# Altium PCB Avalon_ctrlunit.PcbDoc (part 6 of 6)
Units mil, origin at the board's own origin, x right, y up, seen from the top; angles counter-clockwise.
Board outline 3947.62 x 3160.22 mil, 4 copper layers (Top Layer, Mid-Layer 1, Mid-Layer 2, Bottom Layer); 194 components, 260 nets, 936 pads, 465 vias.
Unrouted connection lines stored in the file: 1.
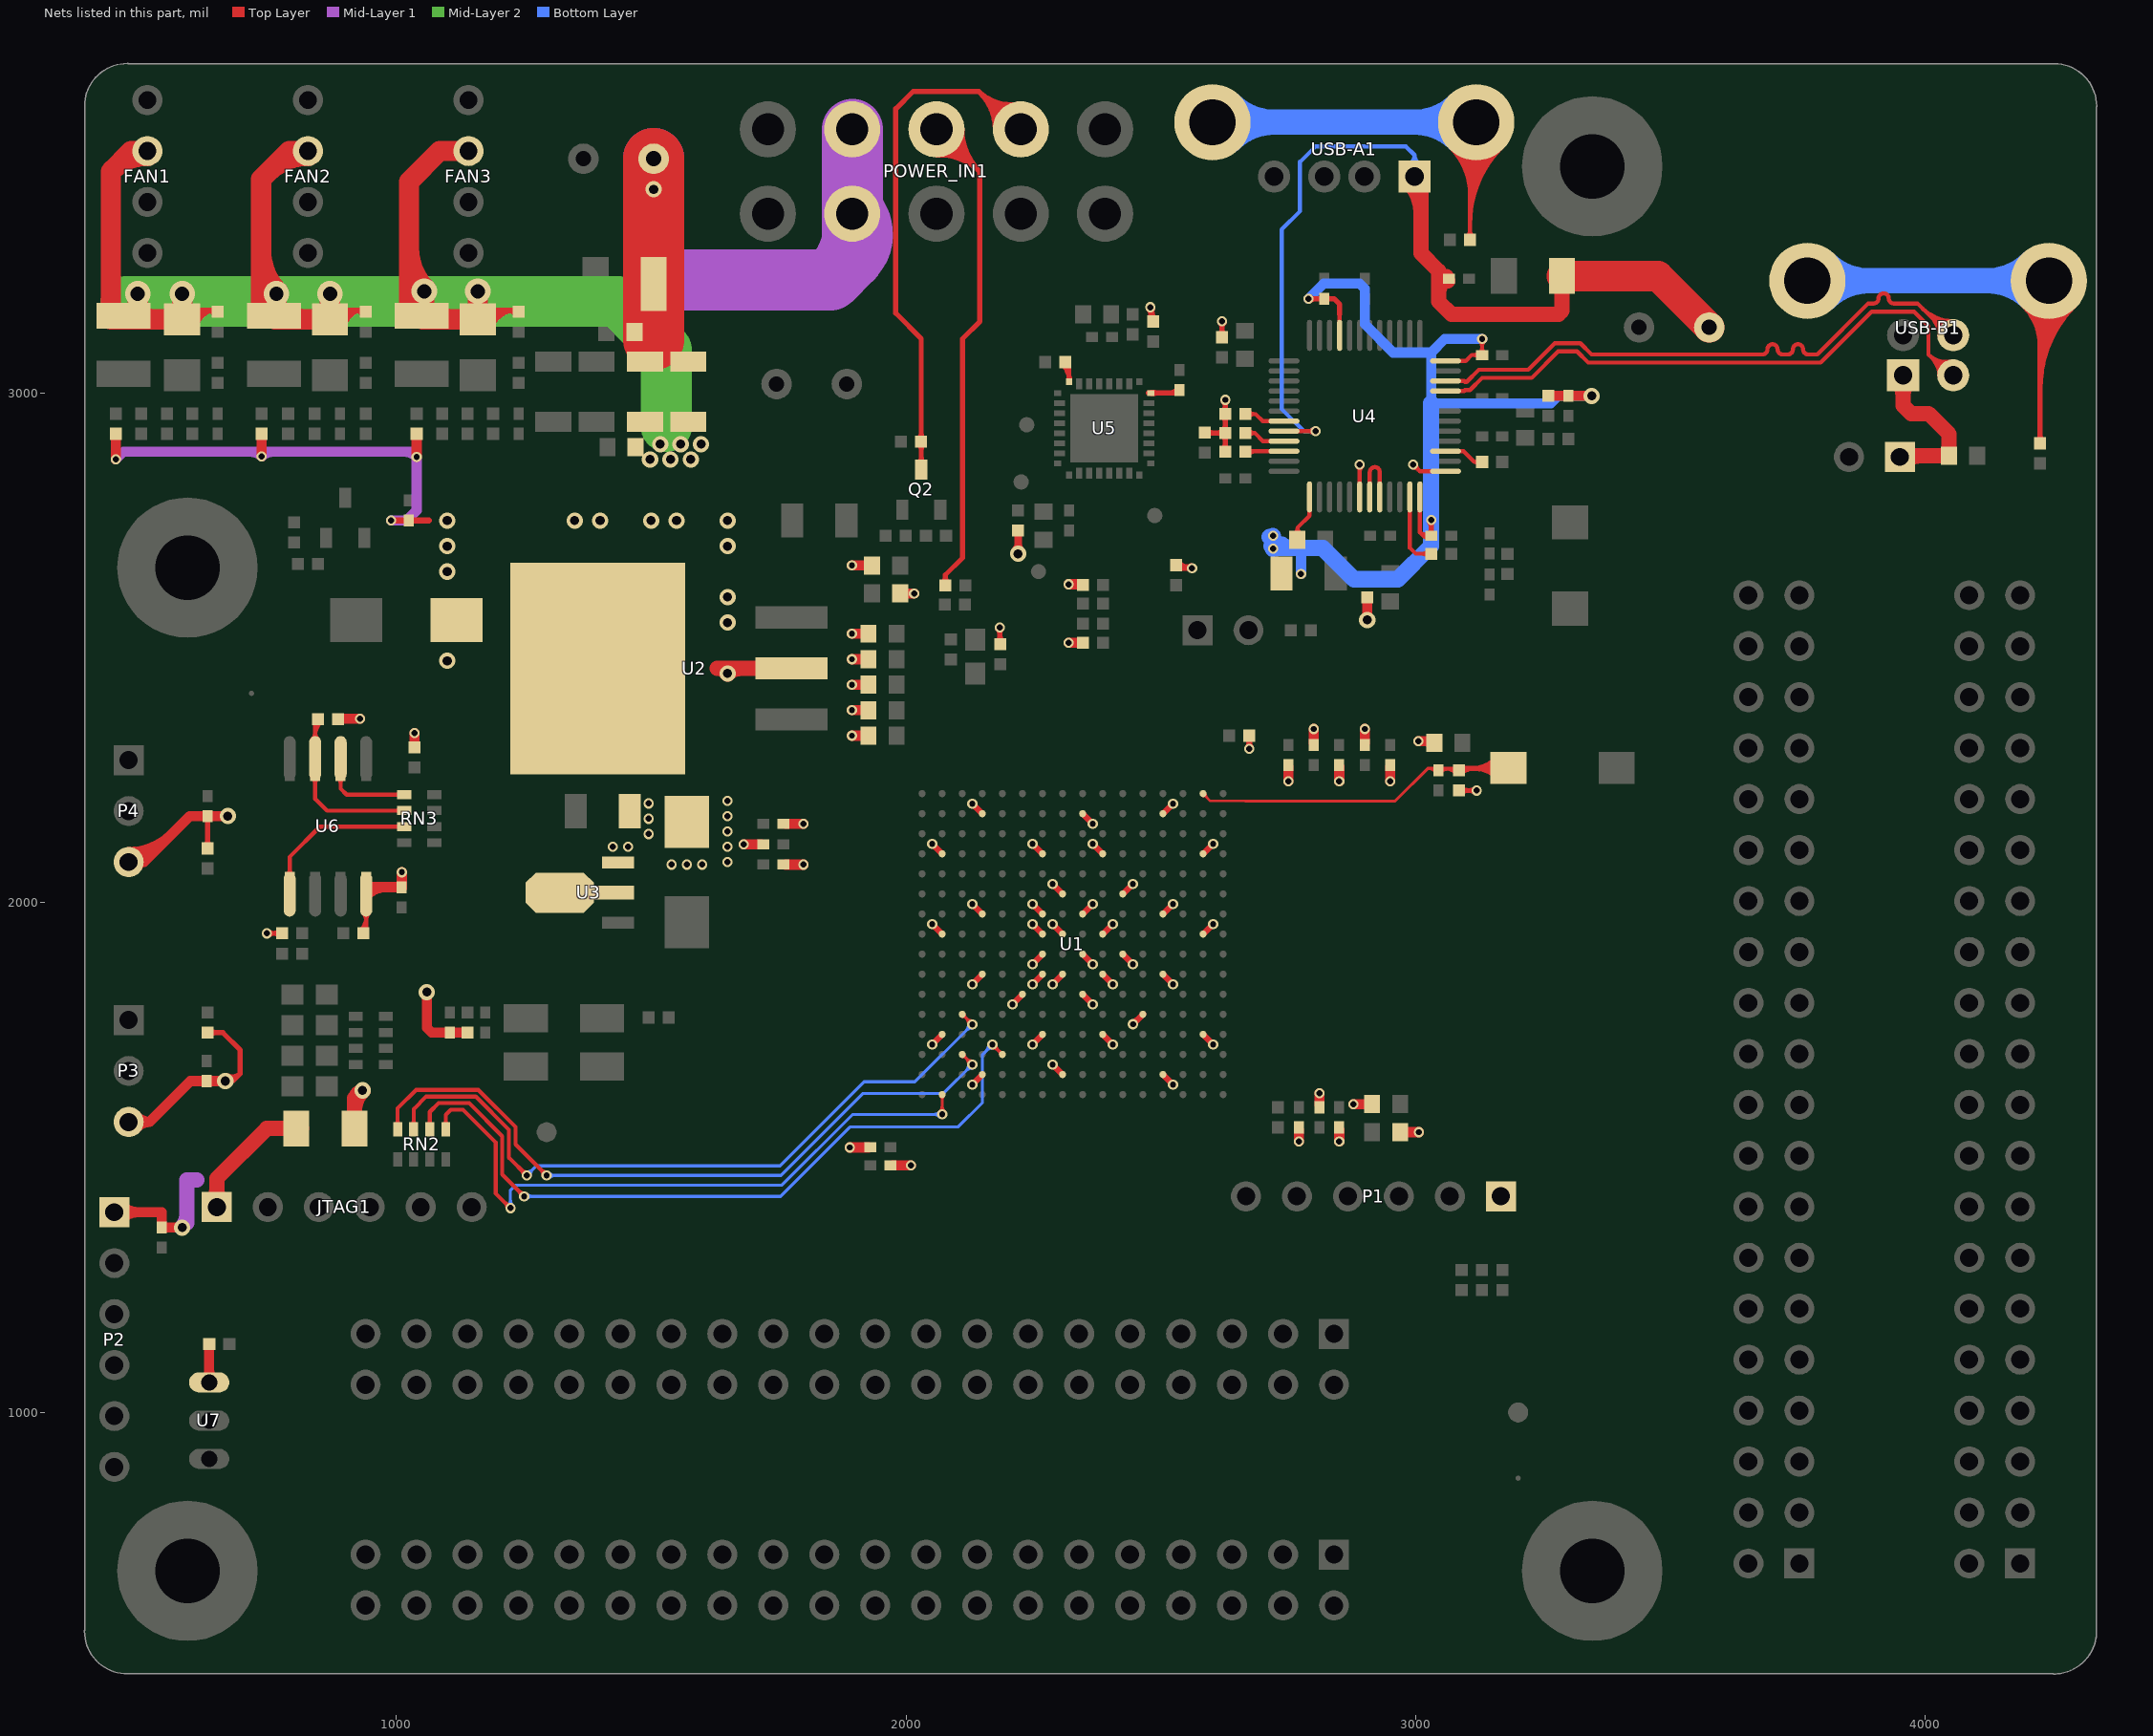
[diagram p8: the nets of this part, all layers, seen from the top]

## Via types
v1: diameter 20, hole 12, Top Layer to Bottom Layer, tented both sides, 334 vias
v2: diameter 32, hole 18, Top Layer to Bottom Layer, tented both sides, 84 vias
v3: diameter 50, hole 28, Top Layer to Bottom Layer, 32 vias
v4: diameter 25.98, hole 12.99, Top Layer to Bottom Layer, tented both sides, 9 vias
v5: diameter 50, hole 28, Top Layer to Bottom Layer, tented both sides, 6 vias

## Nets (pads, with @x,y where several pads share a name; then routed paths per layer and width w, separated by ;. In a path a pad name is that pad's centre, name@x,y a point inside that pad or via, vN(x,y) a via of type N, cw(c..) or ccw(c..) an arc to the next point about the centre after c; other vN are vias at no path point) (continued)
NetR4_1: R4.1 USB-B1.5 USB-B1.6 | length 2168.8
  Top Layer w10: USB-B1.6@4193.03,3171.18 cw(c4115.84,3093.99) 4225,3093.99 ; USB-B1.6@4200.1,3178.25 cw(c4139.98,3118.13) 4225,3118.13 ; USB-B1.6@4207.17,3185.32 cw(c4164.12,3142.27) 4225,3142.27 ; R4.1@4220.18,2906.5 ccw(c4208.56,2918.13) 4225,2918.13 ccw(c4241.44,2918.13) R4.1@4229.82,2906.5 ; R4.1@4225,2901.68 USB-B1.6@4225,3203.15 ; 4225,3010.04 cw(c4452.88,3010.04) USB-B1.6@4291.74,3171.18 ; 4225,3034.18 cw(c4428.74,3034.18) USB-B1.6@4284.67,3178.25 ; 4225,3058.33 cw(c4404.59,3058.33) USB-B1.6@4277.6,3185.32 ; 4225,3082.47 cw(c4380.45,3082.47) USB-B1.6@4270.53,3192.39 ; 4225,3106.61 cw(c4356.31,3106.61) USB-B1.6@4263.46,3199.46 ; 4225,3130.75 cw(c4332.17,3130.75) USB-B1.6@4256.39,3206.53
  Bottom Layer w50: USB-B1.5@3768.37,3220.54 USB-B1.6@4242.39,3220.54 ; USB-B1.5@3803.59,3185.32 cw(c3888.61,3100.3) 3888.61,3220.54 cw(c3888.61,3340.77) USB-B1.5@3803.59,3255.75 ; USB-B1.6@4207.17,3185.32 ccw(c4122.15,3100.3) 4122.15,3220.54 ccw(c4122.15,3340.77) USB-B1.6@4207.17,3255.75
NetR5_1: R5.1 USB-A1.5 USB-A1.6 | length 2307
  Top Layer w8: USB-A1.6@3068.6,3481.67 cw(c2976.64,3389.71) 3106.68,3389.71 ; USB-A1.6@3074.25,3487.32 cw(c2995.95,3409.03) 3106.69,3409.03 ; USB-A1.6@3079.91,3492.98 cw(c3015.27,3428.34) 3106.68,3428.34 ; USB-A1.6@3085.57,3498.64 cw(c3034.58,3447.65) 3106.68,3447.65 ; R5.1@3101.16,3306.52 ccw(c3087.83,3319.86) 3106.68,3319.86 ccw(c3125.54,3319.86) R5.1@3112.21,3306.52 ; R5.1@3106.68,3301 USB-A1.6@3106.68,3519.76 ; 3106.68,3331.88 cw(c3318.51,3331.88) USB-A1.6@3168.73,3481.67 ; 3106.68,3351.2 cw(c3299.2,3351.2) USB-A1.6@3163.07,3487.32 ; 3106.69,3370.51 cw(c3279.88,3370.51) USB-A1.6@3157.41,3492.98 ; 3106.68,3389.83 cw(c3260.57,3389.83) USB-A1.6@3151.76,3498.64 ; 3106.68,3409.14 cw(c3241.25,3409.14) USB-A1.6@3146.1,3504.29 ; 3106.68,3428.45 cw(c3221.94,3428.45) USB-A1.6@3140.44,3509.95 ; 3106.68,3447.77 cw(c3202.63,3447.77) USB-A1.6@3134.79,3515.61
  Bottom Layer w50: USB-A1.5@2601.34,3531.73 USB-A1.6@3118.66,3531.73 ; USB-A1.5@2636.55,3496.52 cw(c2721.57,3411.5) 2721.57,3531.73 cw(c2721.57,3651.97) USB-A1.5@2636.55,3566.95 ; USB-A1.6@3083.45,3496.52 ccw(c2998.43,3411.5) 2998.43,3531.73 ccw(c2998.43,3651.97) USB-A1.6@3083.45,3566.95
NetR7_1: R7.1 U4.11 | length 176.2
  Top Layer w8: U4.11@2988.58,2796.54 2988.58,2696.42 3000,2685 R7.1@3030.32,2685 ; R7.1@3024.79,2679.48 ccw(c3011.46,2666.14) 3011.46,2685 ccw(c3011.46,2703.86) R7.1@3024.79,2690.52
NetR14_1: R14.1 U4.15 | length 101.5
  Top Layer w8: U4.15@3058.46,2886.1 3093.9,2886.1 3115,2865 ; R14.1@3123.99,2860.41 ccw(c3115,2853.89) 3115,2865 ; R14.1@3123.99,2869.59 cw(c3115,2876.11) 3115,2865 ; R14.1@3130.32,2865 3115,2865
NetR18_1: R18.1 U4.45 | length 110.9
  Top Layer w8: R18.1@2665.68,2922 2684,2922 ; R18.1@2671.32,2916.59 cw(c2684,2904.44) 2684,2922 ; R18.1@2671.32,2927.41 ccw(c2684,2939.56) 2684,2922 ; U4.45@2741.54,2905.79 2700.21,2905.79 2684,2922
NetR19_1: R19.1 U4.46 | length 104.4
  Top Layer w8: R19.1@2666.79,2886.1 U4.46@2741.54,2886.1 ; R19.1@2671.21,2879.48 cw(c2687.2,2863.48) 2687.2,2886.1 ; R19.1@2671.21,2890.52 ccw(c2681.88,2901.2) 2681.88,2886.1
NetR20_1: R20.1 U4.43 | length 111.2
  Top Layer w8: R20.1@2665.68,2959 2686,2959 2699.84,2945.16 U4.43@2741.54,2945.16 ; R20.1@2671.21,2953.48 cw(c2684.54,2940.14) 2684.54,2959 cw(c2684.54,2977.86) R20.1@2671.21,2964.52
NetR35_2: R35.2 U5.24 | length 93.9
  Top Layer w8: R35.2@2307.16,3055.48 cw(c2275.92,3024.24) U5.24@2320.1,3024.24 ; R35.2@2312.82,3061.13 cw(c2295.23,3043.55) 2320.1,3043.55 ; U5.24@2320.1,3023.54 R35.2@2320.1,3055.58
  Top Layer w11.81: U5.24@2320.54,3022.42 2320.54,3030.02
NetU4_7: U4.7 U4.8 | length 128.2
  Top Layer w8: U4.7@2909.84,2796.54 2909.84,2844.84 cw(c2920,2844.84) 2920,2855 cw(c2920,2845.47) 2929.53,2845.47 U4.8@2929.53,2796.54
PG: POWER_IN1.3 R12.2 | length 1425.6
  Top Layer w10: POWER_IN1.3@2059.91,3517.68 2061.91,3517.68 2145,3434.58 ; POWER_IN1.3@2060.88,3487.57 cw(c2063.14,3418) 2112.36,3467.22 ; POWER_IN1.3@2061.21,3477.58 cw(c2064.16,3386.39) 2128.68,3450.9 ; POWER_IN1.3@2061.53,3467.59 cw(c2065.19,3354.78) 2145,3434.59 ; R12.2@2072.5,2627.82 ccw(c2060.87,2639.44) 2077.31,2639.44 ccw(c2093.76,2639.44) R12.2@2082.13,2627.82 ; R12.2@2077.31,2623 2077.31,2643.31 2111,2677 2111,3107 2145,3141 2145,3434.58 ; POWER_IN1.3@2090.02,3517.68 ccw(c2157.91,3517.68) 2109.91,3469.68 ; POWER_IN1.3@2100.02,3517.68 ccw(c2192.05,3517.68) 2126.98,3452.61 ; POWER_IN1.3@2110.02,3517.68 ccw(c2226.19,3517.68) 2144.05,3435.53
PLVCC3V3: C55.2 U5.16 | length 91.2
  Top Layer w10: U5.16@2475.75,3000.35 2531.04,3000.35 C55.2@2537,3006.31 ; 2515.67,3000.35 ccw(c2515.67,3025.67) C55.2@2533.58,3007.77
  Top Layer w11.81: U5.16@2480.67,3000.35 2488.27,3000.35
PROG_B1: C64.1 PROG.2 R59.2 U1.T2 | length 958.6
  Top Layer w5: U1.T2@2582.91,2209.78 cw(c2582.91,2198.91) 2590.59,2206.59 cw(c2598.27,2214.28) U1.T2@2587.41,2214.28 ; U1.T2@2582.91,2214.28 2597.41,2199.78 2665.22,2199.78
  Top Layer w6: 2665.22,2199.78 2959.78,2199.78 3023.62,2263.62 R59.2@3085,2263.62 ; 3023.73,2263.62 cw(c3023.73,2240.38) C64.1@3040.16,2256.82 ; 3033.23,2263.62 ccw(c3033.23,2273.42) C64.1@3040.16,2266.49 ; C64.1@3045.77,2259.35 cw(c3052.57,2256.39) C64.1@3054.49,2263.55 ; C64.1@3049.84,2256.82 cw(c3066.27,2240.38) 3066.27,2263.62 ; C64.1@3049.84,2266.49 ccw(c3056.77,2273.42) 3056.77,2263.62 ; C64.1@3051.27,2256.95 cw(c3059.03,2253.57) 3061.22,2261.75 ; C64.1@3054.22,2263.62 cw(c3054.22,2228.91) R59.2@3078.77,2253.45 ; 3068.71,2263.62 cw(c3068.71,2243.39) R59.2@3083.01,2257.7 ; R59.2@3073.23,2263.62 ccw(c3073.23,2271.45) R59.2@3078.77,2265.92
  Top Layer w10: R59.2@3085,2263.62 PROG.2@3181.7,2263.62 ; R59.2@3089.82,2254.87 cw(c3110.95,2233.74) 3110.95,2263.62 ; 3110.47,2263.62 ccw(c3110.47,2332.29) PROG.2@3159.03,2283.74 ; 3117.12,2263.62 cw(c3117.12,2204.36) PROG.2@3159.03,2246.26 ; 3134.61,2263.62 ccw(c3134.61,2308.15) PROG.2@3166.1,2276.66 ; 3141.27,2263.62 cw(c3141.27,2228.5) PROG.2@3166.1,2253.34
PSON#: POWER_IN1.4 Q2.3 R17.1 | length 1483.2
  Top Layer w10: R17.1@2024.87,2900.18 cw(c2012.48,2887.8) 2030,2887.8 ; R17.1@2024.87,2909.82 ccw(c2012.48,2922.2) 2030,2922.2 ; Q2.3@2025.18,2863.06 ccw(c2013.56,2874.69) 2030,2874.69 ccw(c2046.44,2874.69) Q2.3@2034.82,2863.06 ; Q2.3@2030,2850.37 2030,3107 1980,3157 1980,3558 2014,3592 2143,3592 ; 2030,2889.32 cw(c2045.37,2889.32) R17.1@2034.5,2900.18 ; 2030,2920.68 ccw(c2045.37,2920.68) R17.1@2034.5,2909.82 ; 2145.31,3589.69 cw(c2073.31,3517.68) POWER_IN1.4@2175.14,3517.68 ; 2157.05,3577.95 ccw(c2208.66,3629.56) POWER_IN1.4@2219.37,3557.36 ; 2162.39,3572.61 cw(c2107.45,3517.68) POWER_IN1.4@2185.14,3517.68 ; 2171.1,3563.9 ccw(c2212.29,3605.09) POWER_IN1.4@2220.84,3547.47 ; 2179.46,3555.54 cw(c2141.59,3517.68) POWER_IN1.4@2195.14,3517.68 ; POWER_IN1.4@2217.91,3567.25 cw(c2205.03,3654.03) 2143,3592 ; POWER_IN1.4@2225.26,3517.68 2217.32,3517.68 2143,3592
SDI_A: RN3.3 U6.5 | length 412.8
  Top Layer w8: U6.5@785.48,2053.16 ccw(c772.14,2066.5) 791,2066.5 ccw(c809.86,2066.5) U6.5@796.52,2053.16 ; U6.5@786.87,2031.86 cw(c776.89,2021.89) 791,2021.89 cw(c805.11,2021.89) U6.5@795.13,2031.86 ; U6.5@786.87,2055.44 ccw(c776.89,2065.42) 791,2065.42 ccw(c805.11,2065.42) U6.5@795.13,2055.44 ; U6.5@791,2016.14 U6.5@791,2043.65 791,2090 850.25,2149.25 RN3.3@1013,2149.25 ; 998.47,2149.25 ccw(c998.47,2161.84) RN3.3@1007.37,2152.94 ; 999.68,2149.25 cw(c999.68,2138.38) RN3.3@1007.37,2146.07
SDO_A: RN3.1 U6.2 | length 279.1
  Top Layer w8: U6.2@885.48,2246.84 cw(c872.14,2233.5) 891,2233.5 cw(c909.86,2233.5) U6.2@896.52,2246.84 ; U6.2@886.87,2244.56 cw(c876.89,2234.58) 891,2234.58 cw(c905.11,2234.58) U6.2@895.13,2244.56 ; U6.2@886.87,2268.14 ccw(c876.89,2278.11) 891,2278.11 ccw(c905.11,2278.11) U6.2@895.13,2268.14 ; U6.2@891,2283.86 U6.2@891,2256.35 891,2253.35 891,2224 902.76,2212.24 RN3.1@1013,2212.24 ; 998.47,2212.24 ccw(c998.47,2224.83) RN3.1@1007.37,2215.93 ; 999.68,2212.24 cw(c999.68,2201.38) RN3.1@1007.37,2209.06
TCK: RN2.4 U1.C14 | length 1529.8
  Top Layer w6: U1.C14@2110.46,1698.46 cw(c2110.46,1688.81) 2117.29,1695.64 cw(c2124.12,1702.46) U1.C14@2114.46,1702.46 ; U1.C14@2110.46,1702.46 v1(2130.15,1682.78) v1@2131.98,1680.95 ; v1@2123.15,1682.78 ccw(c2106.25,1682.78) 2118.2,1694.73 ccw(c2130.15,1706.68) v1@2130.15,1689.78
  Top Layer w8: RN2.4@999.32,1563.88 ccw(c991.03,1572.18) 1002.76,1572.18 ccw(c1014.48,1572.18) RN2.4@1006.19,1563.88 ; RN2.4@1002.76,1555.53 1002.76,1596.76 1039,1633 1161.15,1633 1234,1560.15 1234,1526 v1(1295,1465) ; v1@1289,1465 ccw(c1274.51,1465) 1284.76,1475.24 ccw(c1295,1485.49) v1@1295,1471
  Bottom Layer w6: v1(1295,1465) 1755,1465 1916,1626 2073.37,1626 v1(2130.15,1682.78) ; v1@1299.95,1460.05 cw(c1311.9,1448.1) 1311.9,1465 cw(c1311.9,1481.9) v1@1299.95,1469.95 ; v1@2123.15,1682.78 cw(c2106.25,1682.78) 2118.2,1670.83 cw(c2130.15,1658.88) v1@2130.15,1675.78
TDI: RN2.2 U1.C12 | length 1610.2
  Top Layer w6: v1@2167.69,1723.98 v1(2169.52,1722.15) U1.C12@2189.2,1702.46 ; v1@2169.52,1715.15 cw(c2169.52,1698.25) 2181.47,1710.2 cw(c2193.42,1722.15) v1@2176.52,1722.15 ; U1.C12@2185.2,1702.46 ccw(c2175.55,1702.46) 2182.38,1709.29 ccw(c2189.2,1716.12) U1.C12@2189.2,1706.46
  Top Layer w8: RN2.2@1062.31,1563.88 ccw(c1054.02,1572.18) 1065.75,1572.18 ccw(c1077.48,1572.18) RN2.2@1069.18,1563.88 ; RN2.2@1065.75,1555.53 1065.75,1589.75 1083,1607 1143,1607 1208,1542 1208,1467 v1(1251,1424) ; v1@1245,1424 ccw(c1230.51,1424) 1240.76,1434.24 ccw(c1251,1444.49) v1@1251,1430
  Bottom Layer w6: v1(1251,1424) 1754,1424 1890,1560 2102,1560 2150,1608 2150,1702.63 v1(2169.52,1722.15) ; v1@1255.95,1419.05 cw(c1267.9,1407.1) 1267.9,1424 cw(c1267.9,1440.9) v1@1255.95,1428.95 ; v1@2162.52,1722.15 cw(c2145.62,1722.15) 2157.57,1710.2 cw(c2169.52,1698.25) v1@2169.52,1715.15
TDO: RN2.3 U1.E14 | length 1531.4
  Top Layer w6: U1.E14@2110.46,1777.2 cw(c2110.46,1767.55) 2117.29,1774.38 cw(c2124.12,1781.2) U1.E14@2114.46,1781.2 ; U1.E14@2110.46,1781.2 v1(2130.15,1761.52) v1@2131.98,1759.69 ; v1@2123.15,1761.52 ccw(c2106.25,1761.52) 2118.2,1773.47 ccw(c2130.15,1785.42) v1@2130.15,1768.52
  Top Layer w8: RN2.3@1030.82,1563.88 ccw(c1022.52,1572.18) 1034.25,1572.18 ccw(c1045.98,1572.18) RN2.3@1037.69,1563.88 ; RN2.3@1034.25,1555.53 1034.25,1595.25 1059,1620 1155.77,1620 1221,1554.77 1221,1500 v1(1256,1465) ; v1@1250,1465 ccw(c1235.51,1465) 1245.76,1475.24 ccw(c1256,1485.49) v1@1256,1471
  Bottom Layer w6: v1(1256,1465) 1275,1484 1753,1484 1918,1649 2017.63,1649 v1(2130.15,1761.52) ; v1@1256,1472 ccw(c1256,1488.9) 1267.95,1476.95 ccw(c1279.9,1465) v1@1263,1465 ; v1@2123.15,1761.52 cw(c2106.25,1761.52) 2118.2,1749.57 cw(c2130.15,1737.62) v1@2130.15,1754.52
TMS: RN2.1 U1.A15 | length 1416.6
  Top Layer w6: v1@2066.14,1589.85 ccw(c2054.2,1601.8) 2071.09,1601.8 ccw(c2087.99,1601.8) v1@2076.04,1589.85 ; U1.A15@2068.27,1620.9 cw(c2061.44,1614.07) 2071.09,1614.07 cw(c2080.75,1614.07) U1.A15@2073.92,1620.9 ; v1(2071.09,1584.9) U1.A15@2071.09,1623.72
  Top Layer w8: RN2.1@1093.81,1563.88 ccw(c1085.52,1572.18) 1097.24,1572.18 ccw(c1108.97,1572.18) RN2.1@1100.68,1563.88 ; RN2.1@1097.24,1555.53 1097.24,1584.24 1107,1594 1131,1594 1195,1530 1195,1430 v1(1224,1401) ; v1@1218,1401 ccw(c1203.51,1401) 1213.76,1411.24 ccw(c1224,1421.49) v1@1224,1407
  Bottom Layer w6: v1@1219.05,1405.95 ccw(c1207.1,1417.9) 1224,1417.9 ccw(c1240.9,1417.9) v1@1228.95,1405.95 ; v1(1224,1401) 1224,1436 1234,1446 1757,1446 1895.9,1584.9 v1(2071.09,1584.9) ; v1@2066.14,1579.95 ccw(c2054.2,1568) 2054.2,1584.9 ccw(c2054.2,1601.8) v1@2066.14,1589.85
USB_N: U4.21 USB-B1.2 | length 1331.9
  Top Layer w8: U4.21@3058.46,3004.21 3095,3004.21 3096.84,3006.06 3106.63,3006.06 3130.57,3030 3227.63,3030 3279.63,3082 3316.37,3082 3338.37,3060 3794.63,3060 3894.63,3160 3977.81,3160 4006,3131.81 4006,3075.69 ; 4013.31,3068.38 cw(c3980.03,3035.1) USB-B1.2@4027.09,3035.1 ; 4016.76,3064.93 ccw(c4044.04,3092.21) USB-B1.2@4051.05,3054.27 ; 4026.97,3054.73 cw(c4007.34,3035.1) USB-B1.2@4035.09,3035.1 ; 4027.52,3054.17 ccw(c4047.4,3074.05) USB-B1.2@4052.5,3046.41 ; USB-B1.2@4049.6,3062.14 cw(c4040.68,3110.37) 4006,3075.69 ; USB-B1.2@4050.59,3031.1 4006,3075.69
USB_P: U4.22 USB-B1.3 | length 1386
  Top Layer w8: U4.22@3058.46,3023.9 3095,3023.9 3096.84,3022.06 3100,3022.06 3123.94,3046 3221,3046 3273,3098 3323,3098 3345,3076 3680,3076 ccw(c3680,3086) 3690,3086 cw(c3700,3086) 3710,3086 ccw(c3720,3086) 3720,3076 3730,3076 ccw(c3730,3086) 3740,3086 cw(c3750,3086) 3760,3086 ccw(c3770,3086) 3770,3076 3788,3076 3888,3176 3898,3176 ccw(c3898,3186) 3908,3186 cw(c3918,3186) 3928,3186 ccw(c3938,3186) 3938,3176 3984.43,3176 USB-B1.3@4050.59,3109.84 ; 3994,3166.44 ccw(c4054.59,3227.03) USB-B1.3@4054.59,3141.34 ; 4007.65,3152.78 ccw(c4054.59,3199.72) USB-B1.3@4054.59,3133.34 ; 4013.31,3147.12 cw(c3980.03,3113.84) USB-B1.3@4027.09,3113.84 ; 4021.31,3139.12 ccw(c4054.59,3172.41) USB-B1.3@4054.59,3125.34 ; 4026.97,3133.47 cw(c4007.34,3113.84) USB-B1.3@4035.09,3113.84
V_USB: C52.1 J1.1 USB-B1.1 | length 433.4
  Top Layer w30: USB-B1.1@3944.5,3023.44 cw(c3916.34,2995.28) 3956.17,2995.28 cw(c3995.99,2995.28) USB-B1.1@3967.83,3023.44 ; J1.1@3950,2875 3952,2877 C52.1@4046.44,2877 4046.44,2919.56 4006,2960 3972,2960 3956.17,2975.83 USB-B1.1@3956.17,3035.1 ; J1.1@3960.27,2864.73 cw(c3989.9,2835.1) 3989.9,2877 ; J1.1@3960.27,2885.27 ccw(c3980.24,2905.24) 3980.24,2877
  Bottom Layer w25: J1.1@3950,2875 J1.1@3952.17,2877.17
VBUS2: C30.1 C43.1 F1.2 U4.44 USB-A1.1 | length 2072.5
  Top Layer w8: U4.44@2741.54,2925.47 v1(2803.47,2925.47) ; v1@2799.23,2921.23 ccw(c2788.99,2910.99) 2788.99,2925.47 ccw(c2788.99,2939.96) v1@2799.23,2929.72
  Top Layer w30: USB-A1.1@2986.13,3413.37 cw(c2928.51,3355.75) 3010,3355.75 ; USB-A1.1@2997.8,3425.04 3010,3412.83 3010,3275 3045,3240 ; 3045,3193.16 cw(c3095.19,3193.16) C30.1@3059.7,3228.65 ; C30.1@3062.69,3219.88 cw(c3065.28,3240) 3045,3240 ; F1.2@3287.09,3230 3287.09,3162.09 3280,3155 3070,3155 3045,3180 3045,3240
  Top Layer w60: F1.2@3287.09,3230 3475,3230 C43.1@3576,3129
  Bottom Layer w8: v1@2799.23,2921.23 ccw(c2788.99,2910.99) 2788.99,2925.47 ccw(c2788.99,2939.96) v1@2799.23,2929.72 ; v1(2803.47,2925.47) 2780.53,2925.47 2737,2969 2737,3321 2773,3357 2773,3454 2803,3484 2981,3484 2997.8,3467.2 ; USB-A1.1@2986.71,3450.2 ccw(c2979.22,3467.2) 2997.8,3467.2 ; USB-A1.1@2997.8,3425.04 2997.8,3467.2 ; USB-A1.1@3008.88,3450.2 cw(c3016.37,3467.2) 2997.8,3467.2
VCC1V2: C11.1 C12.1 C13.1 C21.2 C22.2 C23.2 C24.2 C25.2 C26.1 C27.2 U1.G7 U1.G9 U1.H8 U1.H10 U1.J7 U1.J9 U1.K8 U1.K10 U3.3 | length 490.1
  Top Layer w12: v1(2248.26,1879.63) U1.H10@2267.94,1899.32 ; v1(2248.26,1997.74) U1.K10@2267.94,1978.06 ; v1(2287.63,1840.26) U1.G9@2307.32,1859.94 ; v1(2287.63,1958.37) U1.J9@2307.32,1938.68 ; U1.H8@2346.68,1899.32 v1(2366.37,1879.63) ; U1.K8@2346.68,1978.06 v1(2366.37,1997.74) ; U1.G7@2386.06,1859.94 v1(2405.74,1840.26) ; U1.J7@2386.06,1938.68 v1(2405.74,1958.37)
  Top Layer w20: v1(1682,2115) C12.1@1716.38,2115 ; C11.1@1763.62,2075 v1(1799,2075) ; C13.1@1763.62,2155 v1(1799,2155) ; v1(1894,2328) C21.2@1926.44,2328 ; v1(1894,2378) C25.2@1926.44,2378 ; v1(1894,2428) C22.2@1926.44,2428 ; v1(1894,2478) C23.2@1926.44,2478 ; v1(1894,2528) C24.2@1926.44,2528
  other v1: 1540,2075 1570,2075 1600,2075 1650,2080 1425,2110 1455,2110 1650,2110 1495,2135 1650,2140 1495,2165 1650,2170 1495,2195 1650,2200
VCC3V3: C1.1 C2.1 C3.1 C4.1 C5.1 C6.1 C7.1 C8.1 C9.1 C10.1 C14.1 C16.2 C17.2 C18.2 C19.2 C20.2 C28.2 C59.2 C61.1 C62.1 C69.1 C70.2 F2.2 P1.1 P2.1 P3.3 P4.3 R1.2 R3.1 R8.2 R16.1 R18.2 R19.2 R20.2 R24.1 R26.2 R31.2 R32.1 R34.1 R37.1 R40.1 R41.2 R45.1 R47.1 R48.1 R49.1 R51.1 R52.1 R53.2 R54.1 R59.1 R65.2 U1.B4 U1.B9 U1.B13 U1.D2 U1.D7 U1.D10 U1.D15 U1.E5 U1.F8 U1.F11 U1.G4 U1.G10 U1.G13 U1.H6 U1.J2 U1.J10 U1.J15 U1.K4 U1.K13 U1.L6 U1.L9 U1.N2 U1.N7 U1.N10 U1.N15 U1.R4 U1.R8 U1.R13 U2.2 U2.4 U3.2 U4.6 U4.13 U6.8 U7.3 | length 6036.5
  Top Layer w8: R47.1@930.16,1945.52 ccw(c904,1971.69) 941,1971.69 ; U6.8@935.48,1979.12 cw(c922.14,1965.79) 941,1965.79 cw(c959.86,1965.79) U6.8@946.52,1979.12 ; R47.1@935.82,1939.87 ccw(c923.31,1952.38) 941,1952.38 ; R47.1@941,1932.62 U6.8@941,2016.14 ; v1@2885.91,2855.6 cw(c2875.67,2845.36) 2890.16,2845.36 cw(c2904.64,2845.36) v1@2894.4,2855.6 ; U4.6@2890.16,2796.54 v1(2890.16,2859.84) ; v1@2995,2854 cw(c2995,2839.51) 3005.24,2849.76 cw(c3015.49,2860) v1@3001,2860 ; v1(2995,2860) 3008.27,2846.73 U4.13@3058.46,2846.73
  Top Layer w10: R52.1@625.18,2111.5 ccw(c613.56,2123.13) 630,2123.13 ccw(c646.44,2123.13) R52.1@634.82,2111.5 ; C62.1@626.58,2164.92 cw(c618.31,2156.66) 630,2156.66 cw(c641.69,2156.66) C62.1@633.42,2164.92 ; R51.1@630,1745.32 659.68,1745.32 694,1711 694,1665 ; R52.1@630,2107.69 C62.1@630,2170.32 ; R51.1@634.82,1740.5 cw(c646.44,1728.87) 646.44,1745.31 cw(c646.44,1761.76) R51.1@634.82,1750.13 ; v2(664.68,1650.32) 679.32,1650.32 694,1665 ; v2@665.09,1651.23 ccw(c671.87,1666.52) 683.69,1654.69 ; v2@669.14,1660.37 ccw(c678.2,1680.8) 694,1665 ; v1(746,1940) R49.1@772.38,1940 ; v1@749.54,1936.46 cw(c758.07,1927.93) 758.07,1940 cw(c758.07,1952.07) v1@749.54,1943.54 ; R49.1@771.5,1935.18 ccw(c759.87,1923.56) 759.87,1940 ccw(c759.87,1956.44) R49.1@771.5,1944.82 ; R48.1@2180.18,2512.5 ccw(c2170.97,2521.71) 2184,2521.71 ; v1@2180.46,2536.46 cw(c2171.93,2527.93) 2184,2527.93 cw(c2196.07,2527.93) v1@2187.54,2536.46 ; R48.1@2184,2505.62 v1@2184,2537 ; 2184,2526.54 ccw(c2203.86,2526.54) R48.1@2189.82,2512.5 ; v1@2476.15,3165.15 cw(c2466.85,3155.85) 2480,3155.85 ; v1@2477.18,3164.35 cw(c2470.77,3153.24) 2483.16,3156.56 ; R31.2@2480,3140.69 2480,3168.37 ccw(c2511.54,3168.37) R31.2@2489.71,3145.6 ; 2480,3157.37 cw(c2491,3157.37) v1@2483.22,3165.15 ; 2482.89,3157.6 cw(c2493.81,3160.53) v1@2484.02,3166.19 ; R65.2@2530,2656.69 v1@2565.31,2656.69 ; R65.2@2534.82,2667.5 ccw(c2560.93,2693.61) v1@2560.93,2656.69 ; 2549.4,2659.78 ccw(c2552.61,2671.76) v1@2558.81,2661.02 ; 2549.86,2659.65 cw(c2546.83,2648.32) v1@2556.98,2654.19 ; v1@2557.78,2653.15 ccw(c2549.24,2644.61) 2549.24,2656.69 ccw(c2549.24,2668.76) v1@2557.78,2660.22 ; R3.1@2586.68,2922 R18.2@2626.31,2922 ; R3.1@2590.82,2917.87 cw(c2600.79,2907.9) 2600.79,2922 ; R3.1@2590.82,2927.5 ccw(c2604.1,2940.78) 2604.1,2922 ; R16.1@2615.18,3114.5 ccw(c2603.56,3126.13) 2620,3126.13 ccw(c2636.44,3126.13) R16.1@2624.82,3114.5 ; v1@2616.46,3137.46 cw(c2607.93,3128.93) 2620,3128.93 cw(c2632.07,3128.93) v1@2623.54,3137.46 ; R16.1@2620,3109.68 v1@2620,3145 ; R19.2@2621.5,2889.82 ccw(c2609.87,2901.44) 2626.31,2901.44 ccw(c2642.76,2901.44) R19.2@2631.13,2889.82 ; R20.2@2621.5,2954.18 cw(c2609.87,2942.56) 2626.31,2942.56 cw(c2642.76,2942.56) R20.2@2631.13,2954.18 ; R20.2@2621.5,2963.82 ccw(c2609.87,2975.44) 2626.31,2975.44 ccw(c2642.76,2975.44) R20.2@2631.13,2963.82 ; v1@2622.78,2983.46 cw(c2614.24,2974.93) 2626.31,2974.93 cw(c2638.39,2974.93) v1@2629.85,2983.46 ; R19.2@2626.31,2885 R18.2@2626.31,2922 ; v1@2626.31,2990.69 R20.2@2626.31,2959 R18.2@2626.31,2922 ; R18.2@2631.13,2917.18 ccw(c2642.76,2905.56) 2626.31,2905.56 ccw(c2609.87,2905.56) 2621.5,2917.18 ccw(c2609.87,2905.56) 2609.87,2922 ccw(c2609.87,2938.44) 2621.5,2926.82 ccw(c2609.87,2938.44) 2626.31,2938.44 ccw(c2642.76,2938.44) R18.2@2631.13,2926.82 ; R37.1@2668.87,2323.18 cw(c2657.24,2311.56) 2673.68,2311.56 cw(c2690.13,2311.56) R37.1@2678.5,2323.18 ; v1@2670.04,2305.73 ccw(c2662.27,2313.02) 2672.55,2315.78 ; v1@2670.15,2305.85 ccw(c2661.61,2314.39) 2673.68,2314.39 ccw(c2685.76,2314.39) v1@2677.22,2305.85 ; v1(2673.68,2302.32) R37.1@2673.68,2328 ; 2674.82,2315.78 ccw(c2685.1,2313.02) v1@2677.33,2305.73 ; R59.1@3085,2220.32 v1(3119.68,2220.32) ; R59.1@3089.82,2215.5 cw(c3101.44,2203.87) 3101.44,2220.32 cw(c3101.44,2236.76) R59.1@3089.82,2225.13 ; v1@3116.15,2216.78 ccw(c3107.61,2208.24) 3107.61,2220.32 ccw(c3107.61,2232.39) v1@3116.15,2223.85
  Top Layer w12: v1(990,2750) C70.2@1024.69,2750 ; 1014.96,2750 ccw(c1014.96,2760.35) C70.2@1022.28,2753.03 ; C70.2@1025,2750.31 1063.69,2750.31 ; v1(2051.41,1722.15) U1.D15@2071.09,1741.83 ; v1(2051.41,1958.37) U1.J15@2071.09,1938.68 ; v1(2051.41,2115.85) U1.N15@2071.09,2096.17 ; v1(2130.15,1643.41) U1.B13@2149.83,1663.09 ; v1(2130.15,1840.26) U1.G13@2149.83,1859.94 ; v1(2130.15,1997.74) U1.K13@2149.83,1978.06 ; v1(2130.15,2194.59) U1.R13@2149.83,2174.91 ; v1(2208.89,1800.89) U1.F11@2228.57,1820.57 ; v1(2248.26,1722.15) U1.D10@2267.94,1741.83 ; v1(2248.26,1840.26) U1.G10@2267.94,1859.94 ; v1(2248.26,1958.37) U1.J10@2267.94,1938.68 ; v1(2248.26,2115.85) U1.N10@2267.94,2096.17 ; v1(2287.63,1682.78) U1.B9@2307.32,1663.09 ; v1(2287.63,2037.11) U1.L9@2307.32,2017.43 ; U1.F8@2346.68,1820.57 v1(2366.37,1800.89) ; U1.R8@2346.68,2174.91 v1(2366.37,2155.22) ; v1(2366.37,2115.85) U1.N7@2386.06,2096.17 ; U1.D7@2386.06,1741.83 v1(2405.74,1722.15) ; U1.H6@2425.43,1899.32 v1(2445.11,1879.63) ; U1.L6@2425.43,2017.43 v1(2445.11,2037.11) ; v1(2445.31,1761.72) U1.E5@2464.8,1781.2 U1.E5@2465,1781.41 ; U1.B4@2504.17,1663.09 v1(2523.85,1643.41) ; U1.G4@2504.17,1859.94 v1(2523.85,1840.26) ; U1.K4@2504.17,1978.06 v1(2523.85,1997.74) ; U1.R4@2504.17,2174.91 v1(2523.85,2194.59) ; U1.D2@2582.91,1741.83 v1(2602.59,1722.15) ; U1.J2@2582.91,1938.68 v1(2602.59,1958.37) ; U1.N2@2582.91,2096.17 v1(2602.59,2115.85)
  Top Layer w15: v2@2213.99,2691.01 ccw(c2199.48,2705.52) 2220,2705.52 ccw(c2240.52,2705.52) v2@2226.01,2691.01 ; v2(2220,2685) R24.1@2220,2730.32
  Top Layer w20: P2.1@447,1393 540,1393 C69.1@540,1364.68 ; v1(450,2870) R53.2@450,2916.38 ; P2.1@460.81,1379.19 cw(c494.14,1345.86) 494.14,1393 cw(c494.14,1440.14) P2.1@460.81,1406.81 ; P3.3@475,1570 516,1570 ; P4.3@475,2079.53 ccw(c475,2150.81) 525.41,2100.41 ; P4.3@475,2080 505,2080 ; P4.3@475,2099.53 ccw(c475,2219.1) 559.55,2134.55 ; P3.3@490.16,1557.69 cw(c516,1536.73) 516,1570 ; P3.3@490.16,1582.31 ccw(c516,1603.27) 516,1570 ; P4.3@492.86,2072.1 cw(c505,2066.72) 505,2080 ; P4.3@492.86,2087.9 ccw(c505,2093.28) 505,2080 ; C69.1@540,1362.68 v2(580,1362.68) ; U7.3@626.15,1065.85 ccw(c609.62,1082.38) 633,1082.38 ccw(c656.38,1082.38) U7.3@639.85,1065.85 ; U7.3@633,1059 R54.1@633,1133.68 ; v2(664.68,1650.32) C61.1@628,1650.32 596.32,1650.32 516,1570 ; v2(669.68,2170.32) C62.1@630,2170.32 595.32,2170.32 505,2080 ; v1(736,2876) R41.2@736,2916.38 ; R45.1@887.62,2361 v1(929,2361) ; U6.8@941.11,2036.11 cw(c930.96,2026.18) U6.8@941,2016.14 954.54,2029.69 ; U6.8@942.28,2014.86 cw(c980.48,1976.66) 980.48,2030.69 ; 955.54,2030.69 C59.2@1011,2030.69 v1(1011,2060) ; R40.1@1036,2304.68 v1(1036,2333) ; v1(1040,2875) R26.2@1040,2916.38 ; v2(1060,1825) 1060,1755 1069.69,1745.31 C28.2@1105,1745.31 R1.2@1140,1745.31 ; v1(1890,1520) C9.1@1926.38,1520 ; v1(1894,2662) C19.2@1933.44,2662 ; C8.1@1973.62,1485 v1(2010,1485) ; C20.2@1988.56,2607 v1(2016,2607) ; v1(2319,2510) R34.1@2343.38,2510 ; v1(2319,2625) R32.1@2343.38,2625 ; v1(2750,2238.62) C1.1@2750,2266.38 ; v1(2771,1531.62) C10.1@2771,1554 ; C5.1@2800,2313.62 v1(2800,2341) ; C4.1@2811,1604 v1(2811,1626.38) ; v1(2850,1531.62) C3.1@2850,1554 ; v1(2850,2238.62) C6.1@2850,2266.38 ; v1(2878.06,1605) C18.2@2914.44,1605 ; C7.1@2900,2313.62 v1(2900,2341) ; v2(2905,2555) R8.2@2905,2600.31 ; v1(2950,2238.62) C2.1@2950,2266.38 ; C17.2@2969.56,1550 v1(3005.94,1550) ; v1(3005.06,2317) C16.2@3036.44,2317 ; 3020.07,2317 cw(c3020.07,2299.6) C16.2@3032.38,2311.9 ; U6.8@940.89,2035.88 ccw(c953.44,2048.44) 953.44,2030.69 cw(c953.44,2048.44) U6.8@940.89,2035.88
  Top Layer w30: F2.2@918.09,1557 918.09,1616.09 v2(934,1632) ; F2.2@918.09,1591.17 cw(c974.83,1591.17) v2@934.71,1631.29 ; 918.09,1609.5 cw(c940.51,1609.5) v2@934.28,1631.04 ; v2@1649.16,2449.46 ccw(c1630,2437.32) 1630,2460 U2.2@1775.16,2460 ; v2@1650.71,2449.29 cw(c1676.56,2423.44) 1676.56,2460
  Mid-Layer 1 w20: v1(450,2870) 465,2885 727,2885 v1(736,2876) ; v2(580,1362.68) v2@589,1371.68 ; 714.27,2885 cw(c714.27,2854.27) v1(736,2876) ; 757.73,2885 ccw(c757.73,2854.27) v1(736,2876) ; v1(990,2750) 1020,2750 1040,2770 v1(1040,2875) ; 1015.86,2885 cw(c1015.86,2850.86) v1(1040,2875) ; v1(736,2876) 745,2885 1030,2885 v1(1040,2875)
  Mid-Layer 1 w30: v2@579.29,1363.39 ccw(c555.86,1386.83) 589,1386.83 ; v2@589,1371.68 589,1456 609,1456
  other v1: 2184,2540 2561.31,2656.69 2626.31,2987 2620,3141 2479.68,3168.68
  other v2: 1650,2450 1100,2475 1650,2550 1650,2600 1100,2650 1100,2700 1650,2700 1100,2750 1350,2750 1400,2750 1500,2750 1550,2750 1650,2750
VCC12V: C49.1 C50.2 C51.2 FB1.2 FB2.2 POWER_IN1.2 POWER_IN1.7 | length 1483.4
  Top Layer w120: 1505,3105 C49.1@1505,3460
  Mid-Layer 1 w120: C49.1@1505,3460 1505,3245 1528,3222 1852,3222 ; POWER_IN1.2@1894.55,3517.68 POWER_IN1.7@1894.55,3352.32 1894.55,3264.55 ; POWER_IN1.7@1898.27,3355.48 cw(c1847.07,3312.04) 1894.55,3264.55 ; POWER_IN1.7@1899.41,3352.76 cw(c1735.95,3338.05) 1852,3222 ; 1852,3222 1894.55,3264.55
  other v2: 1505,3400
VDD25OUT: C38.2 C39.2 C40.2 C46.2 C47.2 C48.2 R11.2 U4.1 U4.12 U4.24 U4.33 | length 2487.7
  Top Layer w8: C39.2@2761.41,2724.05 ccw(c2754.01,2736.44) 2768.44,2736.44 ; C39.2@2768.44,2712 2768.44,2736.44 ; C39.2@2774.81,2723.11 cw(c2785.56,2736.44) 2768.44,2736.44 ; U4.1@2791.73,2796.54 2791.73,2759.73 2768.44,2736.44 ; U4.33@2850.79,3113.46 2850.79,3155 ; U4.12@3008.27,2796.54 3008.27,2726.73 ; 3015.29,2719.71 ccw(c3023.35,2727.77) C46.2@3029.51,2718.19 ; C46.2@3024.05,2716.04 ccw(c3015,2707.68) 3015,2720 ; C46.2@3024.05,2723.96 cw(c3015,2732.32) 3015,2720 ; C46.2@3025.19,2724.91 cw(c3017.86,2736.32) 3008.27,2726.73 ; C46.2@3030.31,2720 3015,2720 ; U4.24@3058.46,3063.27 3098.27,3063.27 3110,3075 C47.2@3130.31,3075 v1(3130.31,3106.31) ; C47.2@3124.22,3070.87 ccw(c3114.24,3060.89) 3114.24,3075 ccw(c3114.24,3089.1) C47.2@3124.22,3079.13 ; v1@3126.07,3102.07 cw(c3115.83,3091.83) 3130.31,3091.83 cw(c3144.8,3091.83) v1@3134.56,3102.07 ; C47.2@3126.18,3079.13 ccw(c3116.21,3089.1) 3130.31,3089.1 ccw(c3144.42,3089.1) C47.2@3134.45,3079.13 ; 3008.27,2726.73 3015,2720
  Top Layer w10: v1@2785.47,3185.1 v1(2789.47,3185.1) C48.2@2820.79,3185.1 ; v1@2793.01,3181.57 cw(c2801.54,3173.03) 2801.54,3185.1 cw(c2801.54,3197.17) v1@2793.01,3188.64 ; 2808.8,3185.1 ccw(c2808.8,3197.52) C48.2@2817.58,3188.74 ; 2809.82,3185.1 cw(c2809.82,3174.14) C48.2@2817.58,3181.89 ; C48.2@2821,3185.31 2839.69,3185.31 2850.79,3174.21 2850.79,3155 ; C48.2@2824.42,3181.89 cw(c2832.69,3173.62) 2832.69,3185.31 cw(c2832.69,3197.01) C48.2@2824.42,3188.74 ; v1@3026.78,2747.78 cw(c3018.24,2739.24) 3030.31,2739.24 cw(c3042.39,2739.24) v1@3033.85,2747.78 ; C46.2@3026.89,2723.42 ccw(c3018.62,2731.69) 3030.31,2731.69 ccw(c3042.01,2731.69) C46.2@3033.74,2723.42 ; C46.2@3030.31,2720 v1(3030.31,2751.31)
  Top Layer w20: R11.2@3260,2994.69 C40.2@3300,2994.69 v2(3345.31,2994.69)
  Bottom Layer w20: v1(2775,2645) 2775,2696 ; v1(2789.47,3185.1) 2819.37,3215 2890,3215 2900,3205 2900,3135.36 2955.67,3079.69 3030.31,3079.69 ; v1(3130.31,3106.31) 3056.94,3106.31 3030.31,3079.69 ; v2(3345.31,2994.69) 3279.69,2994.69 3265,2980 3030.31,2980 3030.31,3079.69
  Bottom Layer w32: v1@2713.29,2717.65 cw(c2693.24,2691.44) v1@2725.95,2695.79 ; v1@2715.76,2715.76 ccw(c2763.46,2763.46) 2763.46,2696 ; v1@2716.99,2700.19 cw(c2730.53,2676.82) 2737.48,2702.92 ; v1(2720,2695) v1(2720,2720) ; v1@2721,2696 2775,2696 2817.84,2696 2878.84,2635 2965,2635 3030.31,2700.31 v1(3030.31,2751.31) 3030.31,2980
VFAN12V: C56.2 C58.2 C63.2 C66.2 D1.2 D2.2 D3.2 FAN1.2 FAN2.2 FAN3.2 FB1.1 FB2.1 R25.1 R38.1 R50.1 | length 4540.7
  Top Layer w8: D3.2@580,3145.12 598.5,3163.62 650,3163.62 ccw(c650,3120.68) D3.2@609.73,3135.58 ; D3.2@587.22,3143.91 cw(c615.53,3133.43) 615.53,3163.62 ; D3.2@594.72,3141.13 cw(c627.02,3129.18) 627.02,3163.62 ; D3.2@602.22,3138.35 cw(c638.51,3124.93) R50.1@638.51,3163.62 ; 621.64,3163.62 cw(c621.64,3131.32) R50.1@644.48,3154.16 ; D2.2@877.22,3143.91 cw(c905.53,3133.43) 905.53,3163.62 ; D2.2@884.72,3141.13 cw(c917.02,3129.18) 917.02,3163.62 ; D2.2@888.5,3163.62 940,3163.62 ccw(c940,3120.68) D2.2@899.73,3135.58 ; D2.2@892.22,3138.35 cw(c928.51,3124.93) R38.1@928.51,3163.62 ; 911.64,3163.62 cw(c911.64,3131.32) R38.1@934.48,3154.16 ; D1.2@1167.03,3143.49 cw(c1200.31,3126.04) 1200.31,3163.62 ; D1.2@1174.12,3139.78 cw(c1213.54,3119.11) 1213.54,3163.62 ; D1.2@1178.5,3163.62 1240,3163.62 ccw(c1240,3105.24) D1.2@1188.29,3132.35 ; D1.2@1181.2,3136.06 cw(c1226.77,3112.17) 1226.77,3163.62 ; 1211.64,3163.62 cw(c1211.64,3131.32) R25.1@1234.48,3154.16
  Top Layer w40: 441.58,3436.58 cw(c511.81,3366.34) FAN1.2@511.81,3465.67 ; C56.2@493,3148.12 v5(493,3195) ; C56.2@496.51,3156.04 ccw(c522.88,3182.41) 522.88,3145.12 ; FAN1.2@511.81,3475.2 480.2,3475.2 440,3435 440,3145.12 D3.2@580,3145.12 v5(580,3195) ; C63.2@735,3157.25 cw(c767.86,3157.25) v5@765.38,3190.01 ; 735,3279.5 ccw(c849.5,3279.5) v5@768.54,3198.54 ; 748.07,3433.07 cw(c826.77,3354.37) FAN2.2@826.77,3465.67 ; C63.2@756.05,3156.04 ccw(c734.43,3177.65) C63.2@765,3177.65 ; C63.2@765,3148.12 v5(765,3195) ; C63.2@791.51,3156.04 ccw(c817.88,3182.41) 817.88,3145.12 ; FAN2.2@826.77,3475.2 790.2,3475.2 735,3420 735,3172.09 760,3147.09 761.97,3145.12 D2.2@870,3145.12 v5(870,3195) ; C58.2@1025,3159.02 cw(c1061.49,3159.02) v5@1055.78,3195.06 ; 1025,3284.5 ccw(c1139.5,3284.5) v5@1058.54,3203.54 ; C58.2@1046.05,3156.04 ccw(c1024.43,3177.65) C58.2@1055,3177.65 ; v5@1050.67,3197.5 cw(c1023.12,3181.59) C58.2@1053.85,3173.36 ; C58.2@1055,3153.12 v5(1055,3200) ; C58.2@1081.51,3156.04 ccw(c1107.88,3182.41) 1107.88,3145.12 ; FAN3.2@1141.73,3475.2 1085.2,3475.2 1025,3415 1025,3172.09 1050,3147.09 1051.97,3145.12 D1.2@1160,3145.12 v5(1160,3200)
  Mid-Layer 2 w100: 470,3180 580,3180 870,3180 1347,3180 1435,3180 1530,3085 1530,2935
  other v2: 1498,2870 1538,2870 1578,2870 1518,2900 1558,2900 1598,2900
VREF: F2.1 JTAG1.1 | length 317.6
  Top Layer w30: JTAG1.1@637.73,1413.27 ccw(c612.93,1438.07) 648,1438.07 ccw(c683.07,1438.07) JTAG1.1@658.27,1413.27 ; JTAG1.1@648,1403 648,1459 746,1557 F2.1@813.91,1557
WP_A: R45.2 RN3.2 U6.3 | length 504.8
  Top Layer w8: U6.3@835.48,2246.84 cw(c822.14,2233.5) 841,2233.5 cw(c859.86,2233.5) U6.3@846.52,2246.84 ; U6.3@835.48,2320.88 ccw(c822.14,2334.21) 841,2334.21 ccw(c859.86,2334.21) U6.3@846.52,2320.88 ; U6.3@836.87,2244.56 cw(c826.89,2234.58) 841,2234.58 cw(c855.11,2234.58) U6.3@845.13,2244.56 ; U6.3@836.87,2268.14 ccw(c826.89,2278.11) 841,2278.11 ccw(c855.11,2278.11) U6.3@845.13,2268.14 ; 841,2328.31 cw(c878,2328.31) R45.2@851.84,2354.48 ; 841,2347.62 cw(c858.69,2347.62) R45.2@846.18,2360.13 ; R45.2@846.31,2360 841,2354.69 U6.3@841,2283.86 U6.3@841,2256.35 841,2253.35 841,2204 864.25,2180.75 RN3.2@1013,2180.75 ; 998.47,2180.75 ccw(c998.47,2193.34) RN3.2@1007.37,2184.44 ; 999.68,2180.75 cw(c999.68,2169.88) RN3.2@1007.37,2177.56
pads on no net: MASK1.0 MASK2.0 TPM1.0 TPM2.0 U1.L11 U5.5 U5.12 U5.13 U5.23 U5.25 U5.27 U5.28 U5.29
copper on no net: | length 88.3
  Top Layer w11.81: 2290,2921.61 2301.54,2921.61 ; 2290,2941.3 2301.54,2941.3 ; 2290,2960.98 2301.54,2960.98 ; 2290,3000.35 2297.6,3000.35 ; 2339.92,3019.05 2339.92,3030.59 ; 2398.98,2832.32 2398.98,2843.86 ; 2476.73,2921.61 2488.27,2921.61 ; 2476.73,2941.3 2488.27,2941.3
  other v3: 590.55,588.98 3346.46,588.98 665.55,618.98 3421.46,618.98 515.55,623.98 3271.46,623.98 490.55,688.98 690.55,688.98 3246.46,688.98 3446.46,688.98 520.55,758.98 655.55,758.98 3276.46,758.98 3411.46,758.98 590.55,788.98 3346.46,788.98 590.55,2557.48 665.55,2587.48 515.55,2592.48 490.55,2657.48 690.55,2657.48 520.55,2727.48 655.55,2727.48 590.55,2757.48 3346.46,3344.88 3421.46,3374.88 3271.46,3379.88 3246.46,3444.88 3446.46,3444.88 3276.46,3514.88 3411.46,3514.88 3346.46,3544.88

## Polygon pours and split planes (outlines as drawn)
VCC3V3 on Mid-Layer 1 "VCC3V31" (solid, pour order 19): 4300,550 4275,525 750,525 625,525 600,550 600,1550 600,2675 700,2775 1650,2775 1675,2800 1675,3075 1700,3100 1875,3100 2000,3225 2000,3575 2025,3600 4275,3600 4300,3575 4300,550
VCC1V2 on Mid-Layer 1 "VCC1V22" (solid, pour order 11): 1400,2065 1735,2065 1795,2005 1959.74,1840.26 2287.63,1840.26 2405.74,1840.26 2405.74,1958.37 2366.37,1997.74 2248.26,1997.74 2248.26,1958.37 2051.41,1958.37 1955,2054.78 1955,2550 1915,2550 1595,2230 1415,2230 1400,2215 1400,2065
VCC3V3 on Mid-Layer 1 "VCC3V31" (solid, pour order 13): 1955,1547 2699,1547 2699,2291 1955,2291 1955,1547
GND on Mid-Layer 2 "GND1" (solid, pour order 23): 425,525 425,2750 450,2775 500,2825 1600,2825 1625,2850 1625,3100 1650,3125 2050,3125 2150,3225 2150,3575 2175,3600 4275,3600 4300,3575 4300,550 4275,525 425,525
GND on Mid-Layer 2 "GND2" (solid, pour order 21): 1950,1550 2700,1550 2700,2300 1950,2300 1950,1550

## Keep-outs
Keep-Out Layer:
  lines w10: 393.41,570.86 ccw(c472.15,570.86) 472.15,492.12 ; 393.7,566.3 393.7,3563.7 ; 393.69,3563.28 cw(c472.43,3563.28) 472.43,3642.02 ; 467.87,492.13 4262.13,492.13 ; 471.73,3641.73 4258.27,3641.73 ; 4251.98,491.83 ccw(c4251.98,570.57) 4330.72,570.57 ; 4252.26,3641.74 cw(c4252.26,3563) 4331,3563 ; 4330.71,560.71 4330.71,3569.29

## Other copper
Top Layer:
  rectangle net GND: 820,2490 1025,2625
  rectangle net 5VSB: 3130,3190 3210,3320
  rectangle net GND: 1275,3020 1430,3110
  rectangle net VCC12V: 1450,3020 1610,3110
  rectangle net VFAN12V: 1450,2850 1615,2970
  rectangle net FANGND: 1270,2850 1435,2970
  rectangle net GND: 1860,2700 1930,2825
  rectangle net 5VSB: 1825,2874 1945,3040
  rectangle net GND: 1635,2235 1865,2400
  rectangle net VCC3V3: 1055,2440 1675,2775
  rectangle net VCC3V3: 1195,1910 1280,2570
  rectangle net GND: 1400,1909 1500,1988
  rectangle net GND: 1500,1909 1663,2050
  rectangle net GND: 1300,2140 1379,2220
  rectangle net VCC1V2: 1400,2063 1663,2220
  rectangle net NetC31_2: 2890,2635 2950,2690
  rectangle net VDD25OUT: 2705,2610 2780,2730
  rectangle net GND: 2803,2608 2870,2730
  region net GND: 3406,2318.62 3326,2318.62 3326,2208.62 3406,2208.62
  rectangle net PROG_B1: 3170,2210 3250,2320
Mid-Layer 1:
  rectangle net FANGND: 1270,2850 1435,2970
  rectangle net GND: 1160,1610 1490,1835
  rectangle net GND: 3210,2505 3395,2815
  pour cut-out: 670,2815 1065,2815 1065,2740 1040,2715 670,2715
Mid-Layer 2:
  rectangle net VFAN12V: 1450,2850 1615,2970
  pour cut-out: 397,1338.98 496.02,1338.98 497,1338 497,1248 397.25,1248 397,1247.75
  pour cut-out: 425,1815.98 524.02,1815.98 525,1815 525,1725 425.25,1725 425,1724.75
  pour cut-out: 425,2325.98 524.02,2325.98 525,2325 525,2235 425.25,2235 425,2234.75
  pour cut-out: 970,2800 1010,2800 1010,2730 970,2730

## Silkscreen, mask and mechanical layers (free items; w line width, h text height)
Top Overlay:
  text "+" at 901,2979 h35
  text "+" at 612,2978 h35
  text "+" at 1192,2978 h35
  text "1" at 500,2405 h35 r90
  text "+" at 2125,2370 h35
  text "Avalon Project" at 2715,1931 h60
  text "1" at 500,1890 h35 r90
  text "ControlUnit V1.5" at 2712,1857 h40
  text "+" at 905,1845 h35 r270
  text "----->" at 1696,1330 h120
Bottom Solder:
  lines w30: 899,621.29 939.76,621.29 ; 899,721.29 939.76,721.29 ; 899,1054.36 939.76,1054.36 ; 899,1154.36 939.76,1154.36 ; 3615,703.54 3652.79,703.54 ; 3615,803.54 3652.79,803.54 ; 3615,903.54 3652.79,903.54 ; 3615,1003.54 3652.79,1003.54 ; 3615,1103.54 3652.79,1103.54 ; 3615,1203.54 3652.79,1203.54 ; 3615,1303.54 3652.79,1303.54 ; 3615,1403.54 3652.79,1403.54 ; 3615,1503.54 3652.79,1503.54 ; 3615,1603.54 3652.79,1603.54 ; 3615,1703.54 3652.79,1703.54 ; 3615,1803.54 3652.79,1803.54 ; 3615,1903.54 3652.79,1903.54 ; 3615,2003.54 3652.79,2003.54 ; 3615,2103.54 3652.79,2103.54 ; 3615,2203.54 3652.79,2203.54 ; 3615,2303.54 3652.79,2303.54 ; 3615,2403.54 3652.79,2403.54 ; 3615,2503.54 3652.79,2503.54 ; 3615,2603.54 3652.79,2603.54 ; 4046,703.54 4085.86,703.54 ; 4046,803.54 4085.86,803.54 ; 4046,903.54 4085.86,903.54 ; 4046,1003.54 4085.86,1003.54 ; 4046,1103.54 4085.86,1103.54 ; 4046,1203.54 4085.86,1203.54 ; 4046,1403.54 4085.86,1403.54 ; 4046,1603.54 4085.86,1603.54 ; 4046,1703.54 4085.86,1703.54 ; 4046,1803.54 4085.86,1803.54 ; 4046,1903.54 4085.86,1903.54 ; 4046,2003.54 4085.86,2003.54 ; 4046,2103.54 4085.86,2103.54 ; 4046,2203.54 4085.86,2203.54 ; 4046,2303.54 4085.86,2303.54 ; 4046,2403.54 4085.86,2403.54 ; 4046,2503.54 4085.86,2503.54 ; 4046,2603.54 4085.86,2603.54 ; 4044,1303 4085.86,1303.54 4044,1303 ; 4049,1503 4085.86,1503.54 4049,1503

## Text inside footprints (layer, text, board x,y; h text height)
FAN1: Top Overlay "1" at 603.81,3572.2 h35 r90
FAN2: Top Overlay "1" at 918.77,3572.2 h35 r90
FAN3: Top Overlay "1" at 1233.73,3572.2 h35 r90
U7: Top Overlay "1" at 706,882 h59.05
USB-B1: Mechanical 1 "PCB Edge" at 4227.88,3613.25 h35 r180